# EAGLE board E-Book_v36 (EAGLE 9.7.0), part 1 of 3
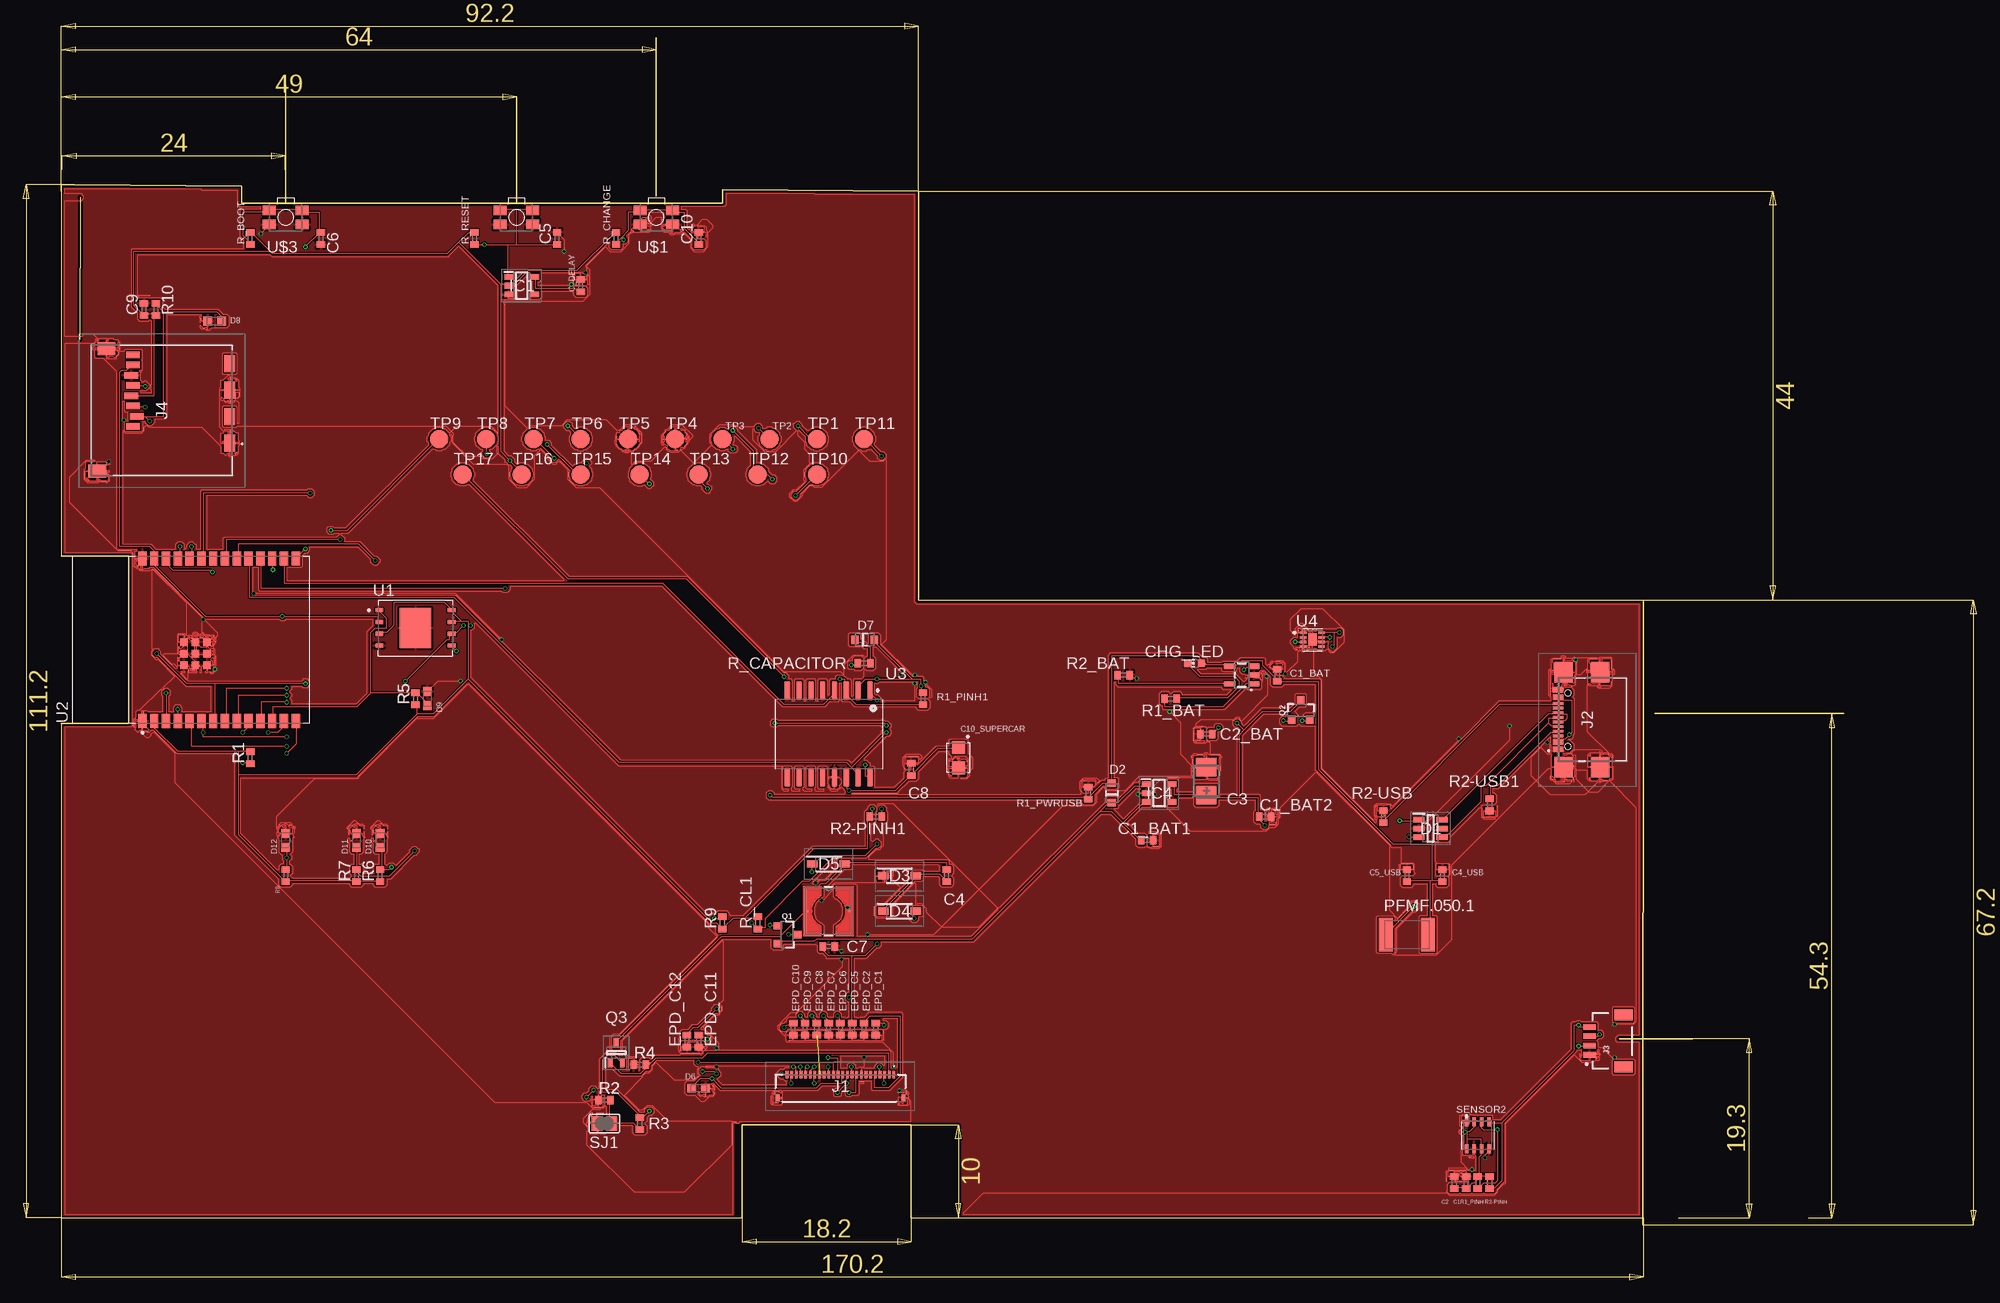
[diagram p0: board, top side]
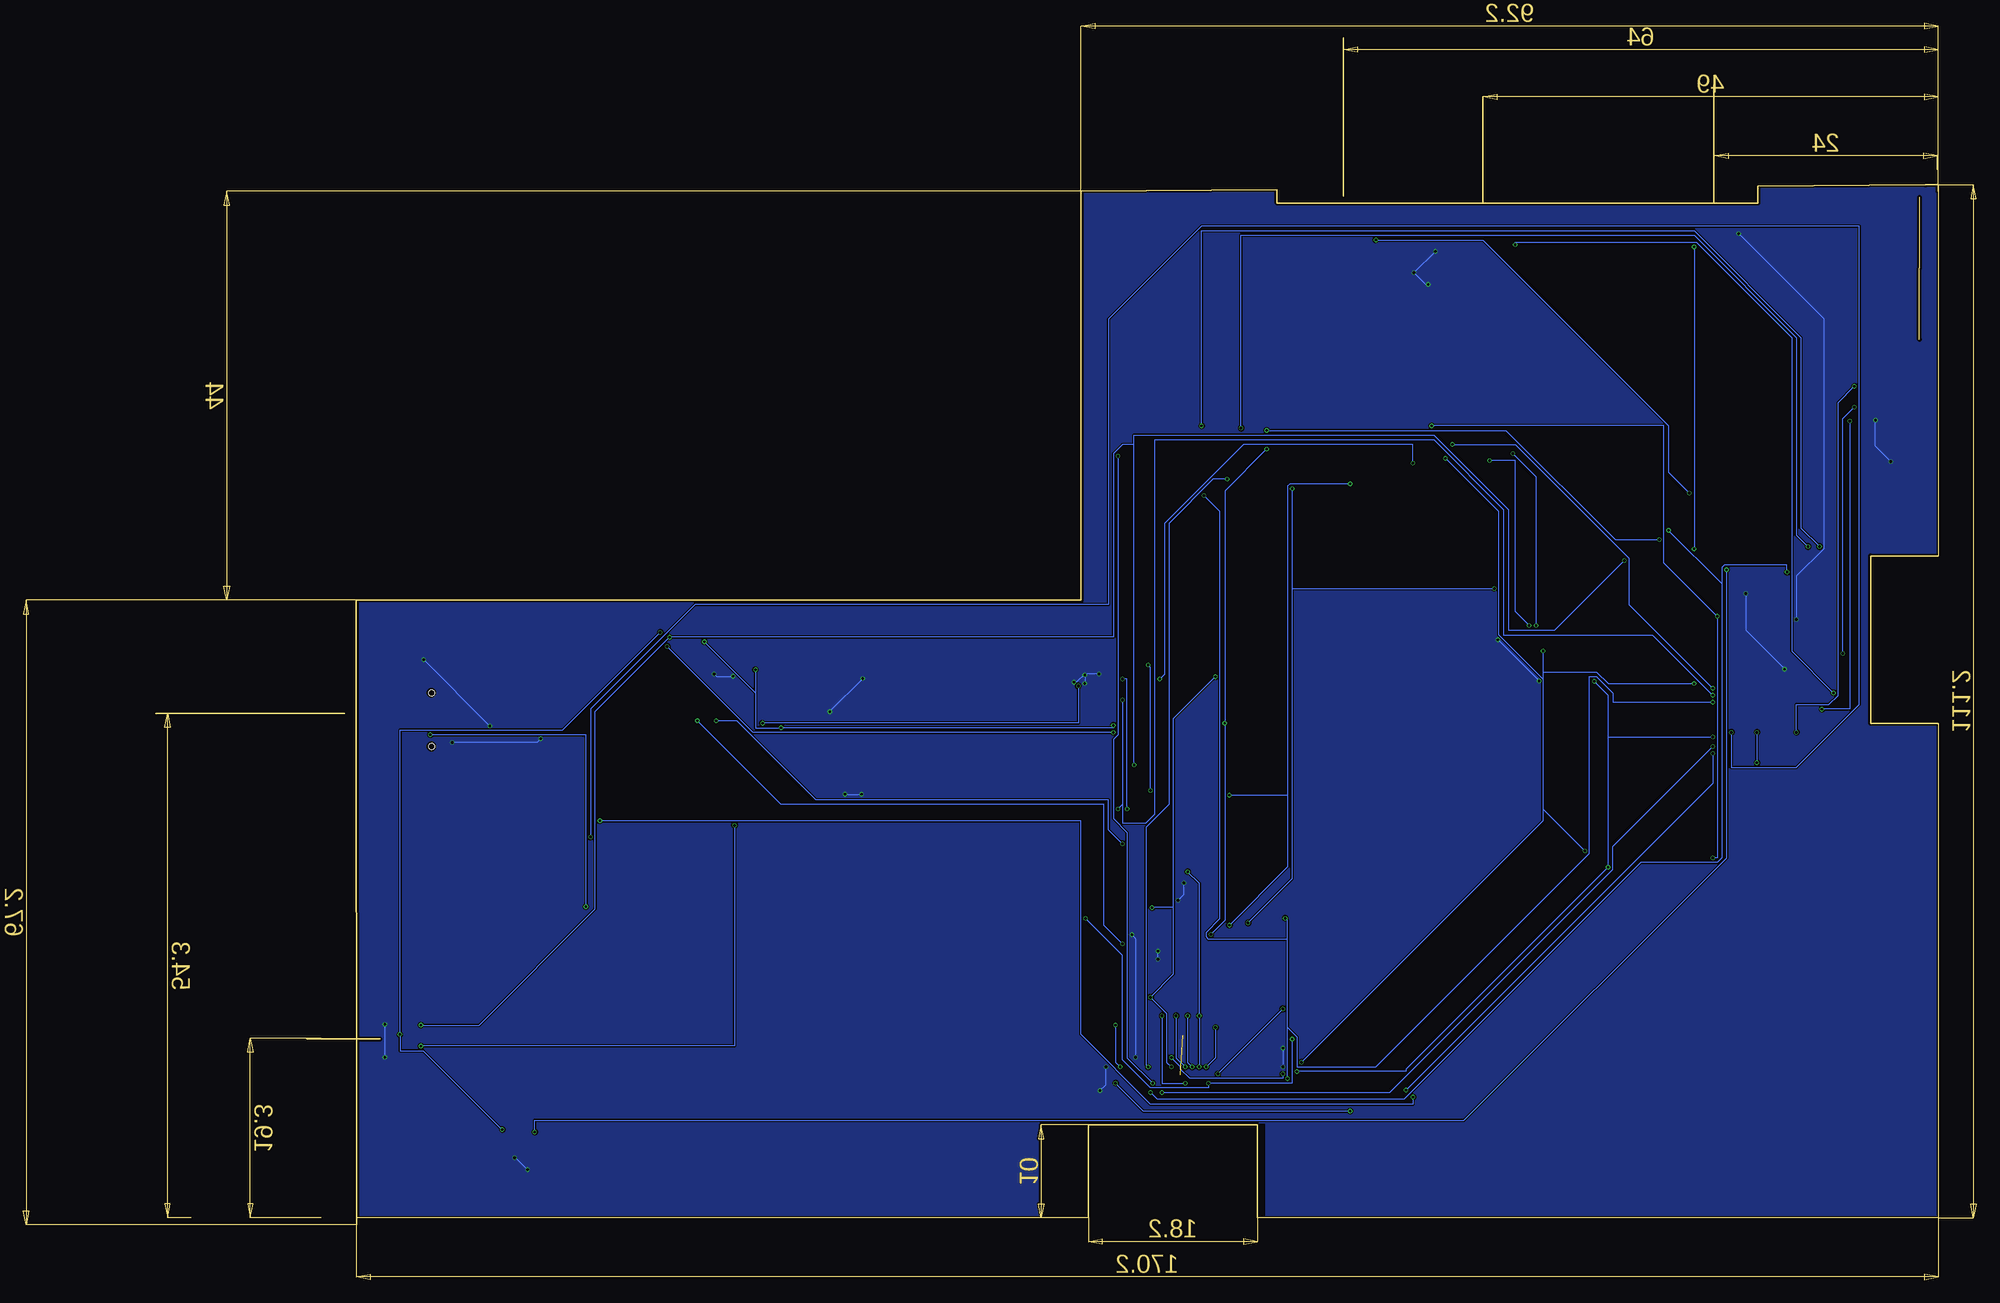
[diagram p1: board, bottom side, seen from below]

Size 210.15 x 135.22 mm. Coordinates in mm from the lower left corner, seen from the top.
Outline: 174.31,6.65 95.55,6.65 95.55,16.65 77.35,16.65 77.35,6.65 4.11,6.65 4.11,59.87 11.37,59.87 11.37,77.89 4.11,77.89 4.11,117.85 5.46,117.84 23.5,117.7 23.5,115.87 75.23,115.87 75.23,117.3 96.31,117.14 96.31,73.14 174.31,73.1 174.29,5.94
Outline: 195.88,60.95 175.56,60.95
Outline: 179.67,25.92 171.75,25.92
Outline: 28.24,128.57 28.24,115.87
Outline: 53.08,127.32 53.08,115.87
Outline: 68.11,133.64 68.11,116.59
Copper layers (1*16): Top 0.035mm / dielectric 1.6mm / Bottom 0.035mm
Design rules "jlcpcb-2layers": minimum track width 5mil, minimum drill 0.3mm, track to track 5mil, track to pad 5mil, pad to pad 5mil, via to via 5mil, smd to smd 5mil, copper to edge 0.2mm, drill to drill 6mil, minimum pad ring 10mil, minimum via ring 3mil, stop-mask expansion 4mil, vias tented up to drill 0mil, thermal gap 10mil

## Footprints (pad centres in the part's own frame; a part is rotated, then mirrored left to right if it is on the bottom)
ESP32_WROVER_EAGLE-LTSPICE_C0402 = smd 0.7 x 0.9: 1 -0.65,0; 2 0.65,0
EAGLE-LTSPICE_C0402 = smd 0.7 x 0.9: 1 -0.65,0; 2 0.65,0
RCL_CT3528 = smd 2 x 2.2: + -1.5,0; - 1.5,0
CAPCP3225X100N = smd 1.4 x 1.4: 1 -1.1,0; 2 1.1,0
ADAFRUIT_CHIP-LED0603 = smd 0.8 x 0.8: A 0,-0.75; C 0,0.75
SOT95P280X145-6N = smd 1.2 x 0.6: 1 -1.25,0.95; 2 -1.25,0; 3 -1.25,-0.95; 4 1.25,-0.95; 5 1.25,0; 6 1.25,0.95
ESP32_WROVER_AVX---SD0805S020S1R0_AVX_SD0805S020S1R0_0 = smd 0.8 x 0.9: 1 -1.05,0; 2 1.05,0
SOD3716X135N = smd 1.15 x 0.8: 1 -1.75,0; 2 1.75,0
DIOC1608X36N = smd 0.97 x 0.94: 1 -0.75,0; 2 0.75,0
SOT95P280X125-5N = smd 0.9 x 0.6: 1 -1.4,0.95; 2 -1.4,0; 3 -1.4,-0.95; 4 1.4,-0.95; 5 1.4,0.95
SOT95P280X120-5N = smd 0.9 x 0.6: 1 -1.4,0.95; 2 -1.4,0; 3 -1.4,-0.95; 4 1.4,-0.95; 5 1.4,0.95
FH34SRJ24S05SH99 = smd 0.3 x 0.8: 1 5.75,1.45; 2 5.25,1.45; 3 4.75,1.45; 4 4.25,1.45; 5 3.75,1.45; 6 3.25,1.45; 7 2.75,1.45; 8 2.25,1.45; 9 1.75,1.45; 10 1.25,1.45; 11 0.75,1.45; 12 0.25,1.45; 13 -0.25,1.45; 14 -0.75,1.45; 15 -1.25,1.45; 16 -1.75,1.45; 17 -2.25,1.45; 18 -2.75,1.45; 19 -3.25,1.45; 20 -3.75,1.45; 21 -4.25,1.45; 22 -4.75,1.45; 23 -5.25,1.45; 24 -5.75,1.45 | smd 0.4 x 0.8: MP1 6.75,-1.05; MP2 -6.75,-1.05
SAMACSYS_PARTS_USB4110GFA = smd 0.3 x 1.15: A1 -3.35,3.678; A4 -2.55,3.678; A5 -1.25,3.678; A6 -0.25,3.678; A7 0.25,3.678; A8 1.25,3.678; A9 2.55,3.678; A12 3.35,3.678; B1 3.05,3.678; B4 2.25,3.678; B5 1.75,3.678; B6 0.75,3.678; B7 -0.75,3.678; B8 -1.75,3.678; B9 -2.25,3.678; B12 -3.05,3.678 | smd 2.18 x 2: MP1 -5.11,-0.827; MP2 5.11,-0.827; MP3 -5.11,3.103; MP4 5.11,3.103 | hole 0.65: -2.89,2.603; 2.89,2.603
JST04_1MM_RA = smd 0.6 x 1.35: 1 -1.5,0; 2 -0.5,0; 3 0.5,0; 4 1.5,0 | smd 1.2 x 2: NC1 2.8,-3.675; NC2 -2.8,-3.675
112ATAARR03ATTEND = smd 1.8 x 1.2: G1 10.6,10.4; G2 4.9,10.4; S1 7.75,10.4; S2 2.05,10.4 | smd 1.4 x 1.9: G3 13.6,-3.85; G4 0.45,-2.85 | smd 0.7 x 1.5: P1 8.8,0; P2 7.7,0.4; P3 6.6,0; P4 5.5,-0.2; P5 4.4,0; P6 3.3,-0.2; P7 2.2,0; P8 1.1,0
IND_4828-WE-TPC_WRE = smd 0.127 x 0.127: 1 -2.286,0; 2 2.286,0
ESP32_WROVER_SPARKFUN-IC-POWER_SOT23-5 = smd 0.55 x 1.2: 1 -0.95,-1.3; 2 0,-1.3; 3 0.95,-1.3; 4 0.95,1.3; 5 -0.95,1.3
ESP32C6_VARISTOR_CT/CN1812 = smd 1.5 x 3.6: 1 -2.25,0; 2 2.25,0
ESP32_WROVER_SPARKFUN-DISCRETESEMI_SOT23-3 = smd 0.8 x 0.9: 1 -0.95,-1; 2 0.95,-1; 3 0,1.1
SOT65P210X110-3N = smd 1.05 x 0.5: 1 -1.05,0.65; 2 -1.05,-0.65; 3 1.05,0
ESP32_WROVER_EAGLE-LTSPICE_R0402 = smd 0.7 x 0.9: 1 -0.65,0; 2 0.65,0
MYBUTTON = smd 1.4 x 1.05: 1 1.75,0.75; 2 -1.75,0.75; 3 -1.75,-0.75; 4 1.75,-0.75
ESP32_WROVER_BME680_PSON80P300X300X100-8N = smd 1.016 x 0.5: 1 1.458,1.2; 2 1.458,0.4; 3 1.458,-0.4; 4 1.458,-1.2; 5 -1.458,-1.22; 6 -1.458,-0.4; 7 -1.458,0.4; 8 -1.458,1.2
SJ = smd 1.168 x 1.6: 1 -0.762,0; 2 0.762,0
TP20R = smd 2 x 2: TP 0,0
SON127P600X800X80-9N = smd 0.94 x 0.44: 1 -3.895,1.905; 2 -3.895,0.635; 3 -3.895,-0.635; 4 -3.895,-1.905; 5 3.895,-1.905; 6 3.895,-0.635; 7 3.895,0.635; 8 3.895,1.905 | smd 3.4 x 4.3: 9 0,0
XCVR_ESP32-C6-WROOM-1-N8 = smd 1.5 x 0.9: 1 -8.75,5.26; 2 -8.75,3.99; 3 -8.75,2.72; 4 -8.75,1.45; 5 -8.75,0.18; 6 -8.75,-1.09; 7 -8.75,-2.36; 8 -8.75,-3.63; 9 -8.75,-4.9; 10 -8.75,-6.17; 11 -8.75,-7.44; 12 -8.75,-8.71; 13 -8.75,-9.98; 14 -8.75,-11.25; 15 8.75,-11.25; 16 8.75,-9.98; 17 8.75,-8.71; 18 8.75,-7.44; 19 8.75,-6.17; 20 8.75,-4.9; 21 8.75,-3.63; 22 8.75,-2.36; 23 8.75,-1.09; 24 8.75,0.18; 25 8.75,1.45; 26 8.75,2.72; 27 8.75,3.99; 28 8.75,5.26 | smd 0.8 x 0.8: 29_1 -2.755,0.79; 29_2 -1.505,0.79; 29_3 -0.255,0.79; 29_4 -2.755,-0.46; 29_5 -1.505,-0.46; 29_6 -0.255,-0.46; 29_7 -2.755,-1.71; 29_8 -1.505,-1.71; 29_9 -0.255,-1.71
SOIC127P1032X265-16N = smd 2.05 x 0.59: 1 -4.655,4.445; 2 -4.655,3.175; 3 -4.655,1.905; 4 -4.655,0.635; 5 -4.655,-0.635; 6 -4.655,-1.905; 7 -4.655,-3.175; 8 -4.655,-4.445; 9 4.655,-4.445; 10 4.655,-3.175; 11 4.655,-1.905; 12 4.655,-0.635; 13 4.655,0.635; 14 4.655,1.905; 15 4.655,3.175; 16 4.655,4.445
SON50P200X200X80-9N = smd 0.76 x 0.27: 1 -0.985,0.75; 2 -0.985,0.25; 3 -0.985,-0.25; 4 -0.985,-0.75; 5 0.985,-0.75; 6 0.985,-0.25; 7 0.985,0.25; 8 0.985,0.75 | smd 0.9 x 1.3: 9 0,0

## Placement (x,y rotation side)
C1  100nF  [ESP32_WROVER_EAGLE-LTSPICE_C0402]  155.24,10.46 90 top
C1_BAT  4.7uF  [ESP32_WROVER_EAGLE-LTSPICE_C0402]  134.92,65.07 90 top
C1_BAT1  4.7uF  [EAGLE-LTSPICE_C0402]  120.95,47.29 0 top
C1_BAT2  4.7uF  [EAGLE-LTSPICE_C0402]  133.65,49.83 0 top
C2  100nF  [ESP32_WROVER_EAGLE-LTSPICE_C0402]  153.97,10.46 90 top
C2_BAT  4.7uF  [ESP32_WROVER_EAGLE-LTSPICE_C0402]  127.3,58.72 180 top
C3  100uF TANT  [RCL_CT3528]  127.3,53.64 90 top
C4  4.7uF/25V  [ESP32_WROVER_EAGLE-LTSPICE_C0402]  99.36,43.48 90 top
C4_USB  1000nF  [EAGLE-LTSPICE_C0402]  152.7,43.48 90 top
C5  1uF  [ESP32_WROVER_EAGLE-LTSPICE_C0402]  57.45,112.06 90 top
C5_USB  4.7uF  [EAGLE-LTSPICE_C0402]  148.89,43.48 90 top
C6  100nF  [ESP32_WROVER_EAGLE-LTSPICE_C0402]  32.05,112.06 270 top
C7  10uF  [ESP32_WROVER_EAGLE-LTSPICE_C0402]  86.66,35.86 0 top
C8  100nF  [ESP32_WROVER_EAGLE-LTSPICE_C0402]  95.55,54.91 90 top
C9  100nF  [ESP32_WROVER_EAGLE-LTSPICE_C0402]  13,104.44 90 top
C10  100nF  [ESP32_WROVER_EAGLE-LTSPICE_C0402]  72.69,112.06 90 top
C10_SUPERCAR  CPH3225A  [CAPCP3225X100N]  100.63,56.18 270 top
C_DELAY  100nF  [ESP32_WROVER_EAGLE-LTSPICE_C0402]  59.99,106.98 90 top
CHG_LED  [ADAFRUIT_CHIP-LED0603]  126.03,66.34 90 top
D1  USBLC6-2SC6Y  [SOT95P280X145-6N]  151.43,48.56 0 top
D2  ESP32_WROVER_AVX---SD0805S020S1R0_AVX_SD0805S020S1R0_0_0AVX_SD0805S020S1R0_0_0  [ESP32_WROVER_AVX---SD0805S020S1R0_AVX_SD0805S020S1R0_0]  117.14,52.37 90 top
D3  MBR0530  [SOD3716X135N]  94.28,43.48 0 top
D4  MBR0530  [SOD3716X135N]  94.28,39.67 0 top
D5  MBR0530  [SOD3716X135N]  86.66,44.75 0 top
D6  PGB1010603MR  [DIOC1608X36N]  72.69,20.62 0 top
D7  ESP32_WROVER_AVX---SD0805S020S1R0_AVX_SD0805S020S1R0_0_0AVX_SD0805S020S1R0_0_0  [ESP32_WROVER_AVX---SD0805S020S1R0_AVX_SD0805S020S1R0_0]  90.53,68.88 0 top
D8  PGB1010603MR  [DIOC1608X36N]  20.62,103.17 180 top
D9  PGB1010603MR  [DIOC1608X36N]  43.48,62.53 90 top
D10  PGB1010603MR  [DIOC1608X36N]  38.4,47.29 90 top
D11  PGB1010603MR  [DIOC1608X36N]  35.86,47.29 90 top
D12  PGB1010603MR  [DIOC1608X36N]  28.24,47.29 90 top
EPD_C1  1uF/50V  [ESP32_WROVER_EAGLE-LTSPICE_C0402]  91.74,26.97 90 top
EPD_C2  1uF/50V  [ESP32_WROVER_EAGLE-LTSPICE_C0402]  90.47,26.97 90 top
EPD_C5  0.1uF/50V  [ESP32_WROVER_EAGLE-LTSPICE_C0402]  89.2,26.97 90 top
EPD_C6  1uF/50V  [ESP32_WROVER_EAGLE-LTSPICE_C0402]  87.93,26.97 90 top
EPD_C7  1uF/50V  [ESP32_WROVER_EAGLE-LTSPICE_C0402]  86.66,26.97 90 top
EPD_C8  1uF/50V  [ESP32_WROVER_EAGLE-LTSPICE_C0402]  85.39,26.97 90 top
EPD_C9  1uF/50V  [ESP32_WROVER_EAGLE-LTSPICE_C0402]  84.12,26.97 90 top
EPD_C10  1uF/50V  [ESP32_WROVER_EAGLE-LTSPICE_C0402]  82.85,26.97 90 top
EPD_C11  1uF/50V  [ESP32_WROVER_EAGLE-LTSPICE_C0402]  72.69,25.7 90 top
EPD_C12  1uF/50V  [ESP32_WROVER_EAGLE-LTSPICE_C0402]  71.42,25.7 90 top
IC1  BD5229G-TR  [SOT95P280X125-5N]  53.64,106.98 0 top
IC4  XC6220A331MR-G  [SOT95P280X120-5N]  122.22,52.37 0 top
J1  FH34SRJ-24S-0.5SH_99_  [FH34SRJ24S05SH99]  87.93,20.62 0 top
J2  SAMACSYS_PARTS_USB4110-GF-A  [SAMACSYS_PARTS_USB4110GFA]  168.83,60.27 90 top
J3  QWIIC_RIGHT_ANGLE  [JST04_1MM_RA]  168.53,25.7 90 top
J4  112A-TAAR-R03_ATTEND  [112ATAARR03ATTEND]  11.81,100.63 270 top
L1  744043680IND_4828-WE-TPC_WRE  [IND_4828-WE-TPC_WRE]  86.66,39.67 0 top
MCP73831  ESP32_WROVER_SPARKFUN-IC-POWER_MCP73831  [ESP32_WROVER_SPARKFUN-IC-POWER_SOT23-5]  131.11,65.07 90 top
PFMF.050.1  ESP32C6_VARISTORCN1812  [ESP32C6_VARISTOR_CT/CN1812]  148.89,37.13 0 top
Q1  20V/4.2A/52mΩ/1.4W  [ESP32_WROVER_SPARKFUN-DISCRETESEMI_SOT23-3]  82.19,37.13 270 top
Q2  20V/4.2A/52mΩ/1.4W  [ESP32_WROVER_SPARKFUN-DISCRETESEMI_SOT23-3]  137.46,61.26 0 top
Q3  SI1308EDL-T1-GE3  [SOT65P210X110-3N]  63.8,24.43 90 top
R1  10K  [ESP32_WROVER_EAGLE-LTSPICE_R0402]  24.43,56.18 90 top
R1_BAT  200  [ESP32_WROVER_EAGLE-LTSPICE_R0402]  123.49,62.53 0 top
R1_PINH  10K  [ESP32_WROVER_EAGLE-LTSPICE_R0402]  156.51,10.46 90 top
R1_PINH1  10K  [ESP32_WROVER_EAGLE-LTSPICE_R0402]  96.82,62.53 90 top
R1_PWRUSB  100K  [ESP32_WROVER_EAGLE-LTSPICE_R0402]  114.6,52.37 90 top
R2  2.2  [ESP32_WROVER_EAGLE-LTSPICE_R0402]  62.53,19.35 0 top
R2-PINH  10K  [ESP32_WROVER_EAGLE-LTSPICE_R0402]  157.78,10.46 90 top
R2-PINH1  10k  [ESP32_WROVER_EAGLE-LTSPICE_R0402]  91.74,49.83 180 top
R2-USB  5K1  [ESP32_WROVER_EAGLE-LTSPICE_R0402]  146.35,49.83 90 top
R2-USB1  5k1  [ESP32_WROVER_EAGLE-LTSPICE_R0402]  157.78,51.1 90 top
R2_BAT  2K  [ESP32_WROVER_EAGLE-LTSPICE_R0402]  118.41,65.07 180 top
R3  0.47  [ESP32_WROVER_EAGLE-LTSPICE_R0402]  66.34,16.81 90 top
R4  10K  [ESP32_WROVER_EAGLE-LTSPICE_R0402]  66.34,23.16 0 top
R5  10K  [ESP32_WROVER_EAGLE-LTSPICE_R0402]  42.21,62.53 90 top
R6  10K  [ESP32_WROVER_EAGLE-LTSPICE_R0402]  38.4,43.48 90 top
R7  10K  [ESP32_WROVER_EAGLE-LTSPICE_R0402]  35.86,43.48 90 top
R8  10K  [ESP32_WROVER_EAGLE-LTSPICE_R0402]  28.24,43.48 90 top
R9  10K  [ESP32_WROVER_EAGLE-LTSPICE_R0402]  75.23,38.4 90 top
R10  10K  [ESP32_WROVER_EAGLE-LTSPICE_R0402]  14.27,104.44 90 top
R_BOOT  10K  [ESP32_WROVER_EAGLE-LTSPICE_R0402]  24.43,112.06 90 top
R_CAPACITOR  15  [ESP32_WROVER_EAGLE-LTSPICE_R0402]  90.47,66.34 180 top
R_CHANGE  10K  [ESP32_WROVER_EAGLE-LTSPICE_R0402]  63.8,112.06 90 top
R_CL1  10K  [ESP32_WROVER_EAGLE-LTSPICE_R0402]  79.04,38.4 90 top
R_RESET  10K  [ESP32_WROVER_EAGLE-LTSPICE_R0402]  48.56,112.06 90 top
RESET_BUTTON  BUTTON_CUSYOMV1  [MYBUTTON]  53.08,114.32 180 top
SENSOR2  ESP32_WROVER_BME680_BME680  [ESP32_WROVER_BME680_PSON80P300X300X100-8N]  156.51,15.54 90 top
SJ1  [SJ]  62.53,16.81 0 top
TP1  TPTP20R  [TP20R]  85.39,90.47 0 top
TP2  TPTP20R  [TP20R]  80.31,90.47 0 top
TP3  TPTP20R  [TP20R]  75.23,90.47 0 top
TP4  TPTP20R  [TP20R]  70.15,90.47 0 top
TP5  TPTP20R  [TP20R]  65.07,90.47 0 top
TP6  TPTP20R  [TP20R]  59.99,90.47 0 top
TP7  TPTP20R  [TP20R]  54.91,90.47 0 top
TP8  TPTP20R  [TP20R]  49.83,90.47 0 top
TP9  TPTP20R  [TP20R]  44.75,90.47 0 top
TP10  TPTP20R  [TP20R]  85.39,86.66 0 top
TP11  TPTP20R  [TP20R]  90.47,90.47 0 top
TP12  TPTP20R  [TP20R]  79.04,86.66 0 top
TP13  TPTP20R  [TP20R]  72.69,86.66 0 top
TP14  TPTP20R  [TP20R]  66.34,86.66 0 top
TP15  TPTP20R  [TP20R]  59.99,86.66 0 top
TP16  TPTP20R  [TP20R]  53.64,86.66 0 top
TP17  TPTP20R  [TP20R]  47.29,86.66 0 top
U1  W25Q512JVEIQ  [SON127P600X800X80-9N]  42.21,70.15 0 top
U2  ESP32-C6-WROOM-1-N8  [XCVR_ESP32-C6-WROOM-1-N8]  18.08,68.88 90 top
U3  DS3231SN#  [SOIC127P1032X265-16N]  86.66,58.72 270 top
U4  MAX17048G+T10  [SON50P200X200X80-9N]  138.73,68.88 0 top
U$1  BUTTON_CUSYOMV1  [MYBUTTON]  68.11,114.32 180 top
U$3  BUTTON_CUSYOMV1  [MYBUTTON]  28.24,114.32 180 top

## Library data of the parts
C1 C1_BAT C1_BAT1 C1_BAT2 C2 C2_BAT C4 C4_USB C5 C5_USB C6-C10 C_DELAY EPD_C1 EPD_C2 EPD_C5-EPD_C12 = DeskAssistant v19 v1; SPICEMODEL: NONE; SPICEPREFIX: C
C3 = DeskAssistant v19 v1; SPICEPREFIX: C
C10_SUPERCAR = DeskAssistant v19 v1; AVAILABILITY: Not in stock; CHECK_PRICES: https://www.snapeda.com/parts/CPH3225A/Seiko+Instruments/view-part/?ref=eda; DESCRIPTION: 11 mF (EDLC) Supercapacitor 3.3 V 1210 (3225 Metric) - -; MF: Seiko Instruments; MP: CPH3225A; PACKAGE: 1210 Seiko; PRICE: None; PURCHASE-URL: https://www.snapeda.com/api/url_track_click_mouser/?unipart_id=562593&manufacturer=Seiko Instruments&part_name=CPH3225A&search_term=None; SNAPEDA_LINK: https://www.snapeda.com/parts/CPH3225A/Seiko+Instruments/view-part/?ref=snap
CHG_LED PFMF.050.1 RESET_BUTTON SJ1 TP1-TP17 U$1 U$3 = DeskAssistant v19 v1
D1 = DeskAssistant v19 v1; AVAILABILITY: In Stock; CHECK_PRICES: https://www.snapeda.com/parts/USBLC6-2SC6Y/STMicroelectronics/view-part/?ref=eda; DESCRIPTION: 17V Clamp 5A (8/20µs) Ipp Tvs Diode Surface Mount SOT-23-6; MF: STMicroelectronics; MP: USBLC6-2SC6Y; PACKAGE: SOT-23-6 STMicroelectronics; PRICE: None; SNAPEDA_LINK: https://www.snapeda.com/parts/USBLC6-2SC6Y/STMicroelectronics/view-part/?ref=snap
D2 D7 = DeskAssistant v19 v1; CENTROID_NOT_SPECIFIED: No; DATASHEET: http://datasheets.avx.com/schottky.pdf; DIGIKEY_DESCRIPTION: DIODE SCHOTTKY 20V 1A 0805; DIGIKEY_PART_NUMBER: 478-7800-1-ND; LEAD_FREE: yes; MF: AVX; MOUSER_PART_NUMBER: 581-SD0805S020S1R0; PACKAGE: 0805 (2012 metric); PREFIX: D; ROHS: yes; TEMPERATURE_RANGE_HIGH: +125°C; TEMPERATURE_RANGE_LOW: -55°C
D3-D5 = DeskAssistant v19 v1; AVAILABILITY: In Stock; CHECK_PRICES: https://www.snapeda.com/parts/MBR0530/Onsemi/view-part/?ref=eda; DESCRIPTION: Diode Schottky 30 V 500mA Surface Mount SOD-123; MF: ON Semiconductor; MP: MBR0530; PACKAGE: SOD-123-2 ON Semiconductor; PRICE: None; PURCHASE-URL: https://www.snapeda.com/api/url_track_click_mouser/?unipart_id=179458&manufacturer=ON Semiconductor&part_name=MBR0530&search_term=None; SNAPEDA_LINK: https://www.snapeda.com/parts/MBR0530/Onsemi/view-part/?ref=snap
D6 D8-D12 = DeskAssistant v19 v1; AVAILABILITY: In Stock; CHECK_PRICES: https://www.snapeda.com/parts/PGB1010603MR/Littelfuse/view-part/?ref=eda; DESCRIPTION: 150V (Typ) Clamp - Ipp Tvs Diode Surface Mount 0603 (1608 Metric); MF: Littelfuse Inc.; MP: PGB1010603MR; PACKAGE: 0603 Littelfuse Inc.; PRICE: None; PURCHASE-URL: https://www.snapeda.com/api/url_track_click_mouser/?unipart_id=5659453&manufacturer=Littelfuse Inc.&part_name=PGB1010603MR&search_term=None; SNAPEDA_LINK: https://www.snapeda.com/parts/PGB1010603MR/Littelfuse/view-part/?ref=snap
IC1 = DeskAssistant v19 v1; DESCRIPTION: Voltage Detector with Adjustable Delay Time: CMOS processes are utilized to develop high precision, low current consumption CMOS reset ICs that allow arbitrary setting of the delay time. The extensive lineup includes both Nch Open Drain and CMOS output types in a wide range of detection voltages (from 2.3V to 6.0V, in 0.1V steps), enabling selection of the ideal solution based on customer requirements. In addition, the entire series is of course both lead-free and RoHS-compliant.; HEIGHT: 1.25mm; MANUFACTURER_NAME: ROHM Semiconductor; MANUFACTURER_PART_NUMBER: BD5229G-TR; MOUSER_PART_NUMBER: 755-BD5229G-TR; MOUSER_PRICE-STOCK: https://www.mouser.co.uk/ProductDetail/ROHM-Semiconductor/BD5229G-TR?qs=4kLU8WoGk0vvnhrrYwdszw%3D%3D
IC4 = DeskAssistant v19 v1; DESCRIPTION: LDO Voltage Regulators; HEIGHT: 1.2mm; MANUFACTURER_NAME: Torex; MANUFACTURER_PART_NUMBER: XC6220A331MR-G; MOUSER_PART_NUMBER: 865-XC6220A331MR-G; MOUSER_PRICE-STOCK: https://www.mouser.co.uk/ProductDetail/Torex-Semiconductor/XC6220A331MR-G?qs=AsjdqWjXhJ8ZSWznL1J0gg%3D%3D
J1 = DeskAssistant v19 v1; DESCRIPTION: 24 Position FFC, FPC Connector Contacts, Top and Bottom 0.020" (0.50mm) Surface Mount, Right Angle; HEIGHT: 1.1mm; MANUFACTURER_NAME: Hirose; MANUFACTURER_PART_NUMBER: FH34SRJ-24S-0.5SH(99); MOUSER_PART_NUMBER: 798-FH34SRJ24S05SH99; MOUSER_PRICE-STOCK: https://www.mouser.co.uk/ProductDetail/Hirose-Connector/FH34SRJ-24S-0.5SH99?qs=vcbW%252B4%252BSTIpKBl5ap9J8Fw%3D%3D
J2 = DeskAssistant v19 v1; DESCRIPTION: CONN USB 2.0 TYPE-C R/A SMT; HEIGHT: 3.26mm; MANUFACTURER_NAME: GCT (GLOBAL CONNECTOR TECHNOLOGY); MANUFACTURER_PART_NUMBER: USB4110-GF-A; MOUSER_PART_NUMBER: 640-USB4110-GF-A; MOUSER_PRICE-STOCK: https://www.mouser.co.uk/ProductDetail/GCT/USB4110-GF-A?qs=KUoIvG%2F9IlYiZvIXQjyJeA%3D%3D
J3 = DeskAssistant v19 v1; PROD_ID: CONN-13694
J4 = DeskAssistant v19 v1; DESCRIPTION: Micro SD Card Socket, Push-Push Type, Top Mount, SMT, H=1.83mm, 10u; HEIGHT: 1.9mm; MANUFACTURER_NAME: ATTEND; MANUFACTURER_PART_NUMBER: 112A-TAAR-R03 ATTEND
L1 = DeskAssistant v19 v1; COPYRIGHT: Copyright (C) 2024 Ultra Librarian. All rights reserved.; MANUFACTURER_PART_NUMBER: 744043680; MFR_NAME: Wurth Electronics
MCP73831 = DeskAssistant v19 v1; PROD_ID: IC-09995
Q1 Q2 = DeskAssistant v19 v1; PROD_ID: TRAN-14388
Q3 = DeskAssistant v19 v1; AVAILABILITY: In Stock; CHECK_PRICES: https://www.snapeda.com/parts/SI1308EDL-T1-GE3/Vishay+Siliconix/view-part/?ref=eda; DESCRIPTION: Si1308EDL-T1-GE3 N-channel MOSFET Transistor, 1.5 A, 30 V, 3-Pin SC-70 | Siliconix / Vishay SI1308EDL-T1-GE3; MF: Vishay Siliconix; MP: SI1308EDL-T1-GE3; PACKAGE: SOT-323 Vishay Semiconductor; PRICE: None; PURCHASE-URL: https://www.snapeda.com/api/url_track_click_mouser/?unipart_id=274603&manufacturer=Vishay Siliconix&part_name=SI1308EDL-T1-GE3&search_term=None; SNAPEDA_LINK: https://www.snapeda.com/parts/SI1308EDL-T1-GE3/Vishay+Siliconix/view-part/?ref=snap
R1 R1_BAT R1_PINH R1_PINH1 R1_PWRUSB R2 R2-PINH R2-PINH1 R2-USB R2-USB1 R2_BAT R3-R10 R_BOOT R_CAPACITOR R_CHANGE R_CL1 R_RESET = DeskAssistant v19 v1; SPICEMODEL: NONE; SPICEPREFIX: R
SENSOR2 = DeskAssistant v19 v1; AVAILABILITY: Unavailable; DESCRIPTION: Integrated Environmental Unit; MF: Bosch Sensortec; MP: BME680; PACKAGE: LGA-8 Bosch Tools; PRICE: None
U1 = DeskAssistant v19 v1; AVAILABILITY: In Stock; CHECK_PRICES: https://www.snapeda.com/parts/W25Q512JVEIQ/Winbond+Electronics/view-part/?ref=eda; DESCRIPTION: FLASH - NOR Memory IC 512Mb (64M x 8) SPI - Quad I/O 133 MHz 8-WSON (8x6); MF: Winbond Electronics; MP: W25Q512JVEIQ; PACKAGE: Package; PRICE: None; SNAPEDA_LINK: https://www.snapeda.com/parts/W25Q512JVEIQ/Winbond+Electronics/view-part/?ref=snap
U2 = DeskAssistant v19 v1; AVAILABILITY: In Stock; CHECK_PRICES: https://www.snapeda.com/parts/ESP32-C6-WROOM-1-N8/Espressif+Systems/view-part/?ref=eda; DESCRIPTION: Multiprotocol Modules ESP32-C6 module, Wi-Fi 6 in 2.4 GHz band, Bluetooth 5, Zigbee 3.0 and Thread. ESP34-WROOM Compatible - ENGINEERING SAMPLE; MF: Espressif Systems; MP: ESP32-C6-WROOM-1-N8; PACKAGE: None; PRICE: None; SNAPEDA_LINK: https://www.snapeda.com/parts/ESP32-C6-WROOM-1-N8/Espressif+Systems/view-part/?ref=snap
U3 = DeskAssistant v19 v1; AVAILABILITY: In Stock; CHECK_PRICES: https://www.snapeda.com/parts/DS3231SN%23/Analog+Devices/view-part/?ref=eda; DESCRIPTION: Extremely Accurate I²C-Integrated RTC/TCXO/Crystal; MF: Analog Devices; MP: DS3231SN#; PACKAGE: SOIC-16 Maxim; PRICE: None; PURCHASE-URL: https://www.snapeda.com/api/url_track_click_mouser/?unipart_id=99048&manufacturer=Analog Devices&part_name=DS3231SN#&search_term=None; SNAPEDA_LINK: https://www.snapeda.com/parts/DS3231SN%23/Analog+Devices/view-part/?ref=snap
U4 = DeskAssistant v19 v1; AVAILABILITY: In Stock; CHECK_PRICES: https://www.snapeda.com/parts/MAX17048G+T10/Analog+Devices/view-part/?ref=eda; DESCRIPTION: 3µA 1-Cell/2-Cell Fuel Gauge with ModelGauge; MF: Analog Devices; MP: MAX17048G+T10; PACKAGE: TDFN-8 Maxim; PRICE: None; PURCHASE-URL: https://www.snapeda.com/api/url_track_click_mouser/?unipart_id=329239&manufacturer=Analog Devices&part_name=MAX17048G+T10&search_term=None; SNAPEDA_LINK: https://www.snapeda.com/parts/MAX17048G+T10/Analog+Devices/view-part/?ref=snap

## Nets
3V3: C1_BAT2.1 C3.+ C9.1 D7.2 IC1.2 IC4.5 J3.2 J4.P4 Q2.3 R1.2 R1_PINH1.2 R2-PINH1.2 R5.1 R6.1 R7.1 R8.1 R9.1 R10.1 R_BOOT.2 R_CHANGE.2 R_CL1.2 R_RESET.2 TP16.TP U1.3 U1.7 U1.8 U2.2 U3.2
32KHZ: R2-PINH1.1 U2.9 U3.1
DN: D1.4 J2.A7 J2.B7
DP: D1.6 J2.A6 J2.B6
EPD_3V3: C7.1 EPD_C5.2 J1.15 J1.16 L1.2 Q2.2 TP17.TP
EPD_3V3_C: Q2.1 R_CL1.1 TP13.TP U2.18
EPD_BUSY: J1.9 TP9.TP U2.26
EPD_CS: D6.1 J1.12 R9.2 TP10.TP U2.11
EPD_DC: J1.11 TP11.TP U2.5
EPD_RST: J1.10 TP12.TP U2.21
FLASH_CS: D9.1 R5.2 U1.1 U2.12
GDR: J1.2 Q3.1 R4.2
GND: C1.2 C1_BAT1.2 C1_BAT2.2 C1_BAT.2 C2.2 C2_BAT.2 C3.- C4_USB.2 C5.2 C5_USB.2 C6.2 C7.2 C8.2 C9.2 C10.2 C10_SUPERCAR.2 C_DELAY.2 D1.2 D3.1 D6.2 D8.2 D9.2 D10.2 D11.2 D12.2 EPD_C1.1 EPD_C2.1 EPD_C5.1 EPD_C6.1 EPD_C7.1 EPD_C8.1 EPD_C9.1 EPD_C10.1 EPD_C11.1 EPD_C12.1 IC1.3 IC4.2 J1.8 J1.17 J1.MP1 J1.MP2 J2.A1 J2.A12 J2.B1 J2.B12 J2.MP1 J2.MP2 J2.MP3 J2.MP4 J3.1 J4.G1 J4.G2 J4.G3 J4.G4 J4.P6 MCP73831.2 R1_PWRUSB.2 R2-USB1.1 R2-USB.2 R2.1 R2_BAT.1 R4.1 RESET_BUTTON.1 RESET_BUTTON.2 SENSOR2.1 SENSOR2.5 SENSOR2.7 SJ1.1 TP4.TP TP5.TP U1.4 U1.9 U2.1 U2.28 U2.29_1 U2.29_2 U2.29_3 U2.29_4 U2.29_5 U2.29_6 U2.29_7 U2.29_8 U2.29_9 U3.13 U4.1 U4.4 U4.6 U4.9 U$1.1 U$1.2 U$3.1 U$3.2
GPIO8: R1.1 U2.10
I2C_PW: C1.1 C2.1 R1_PINH.2 R2-PINH.2 SENSOR2.2 SENSOR2.6 SENSOR2.8 U2.17
INT_RTC: R1_PINH1.1 TP15.TP U2.8 U3.3
IO/BOOT: C6.1 R_BOOT.1 U2.15 U$3.3 U$3.4
IO/CHANGE: C10.1 R_CHANGE.1 U2.23 U$1.3 U$1.4
MISO: D12.1 J4.P7 R8.2 TP6.TP U1.2 U2.27
MOSI: D11.1 J1.14 J4.P3 R7.2 TP7.TP U1.5 U2.7
N$1: J2.B5 R2-USB.1
N$2: J2.A5 R2-USB1.2
N$4: CHG_LED.C R1_BAT.2
N$5: EPD_C1.2 J1.4
N$6: MCP73831.5 R2_BAT.2
N$7: EPD_C2.2 J1.5
N$9: MCP73831.1 R1_BAT.1
N$11: EPD_C6.2 J1.18
N$12: EPD_C7.2 J1.19
N$13: EPD_C8.2 J1.20
N$15: EPD_C10.2 J1.22
N$17: EPD_C12.2 J1.24
N$24: C_DELAY.1 IC1.5
N$26: C1_BAT1.1 D2.1 IC4.1 IC4.3 Q1.2
N$30: C4.1 D3.2 D4.1
N$31: D7.1 R_CAPACITOR.1
PREVGH: D5.1 EPD_C9.2 J1.21
PREVGL: D4.2 EPD_C11.2 J1.23
RESE: J1.3 Q3.2 R3.2
RESE': R2.2 R3.1 SJ1.2
RESET: C5.1 IC1.1 R_RESET.1 RESET_BUTTON.3 RESET_BUTTON.4 U2.3
RTC_RST: U2.16 U3.4
RX: TP2.TP U2.24
SCK: D10.1 J1.13 J4.P5 R6.2 TP8.TP U1.6 U2.6
SCL: J3.4 R2-PINH.1 SENSOR2.4 U2.20 U3.16 U4.7
SDA: J3.3 R1_PINH.1 SENSOR2.3 U2.19 U3.15 U4.8
SRC: C4.2 D5.2 L1.1 Q3.3
SS_SD: D8.1 J4.P2 R10.2 U2.4
TX: TP1.TP U2.25
USB_D+: D1.1 U2.14
USB_D-: D1.3 U2.13
VBAT: C2_BAT.1 MCP73831.3 Q1.3 TP3.TP U4.2 U4.3
VBUS: C1_BAT.1 C4_USB.1 C5_USB.1 CHG_LED.A D1.5 D2.2 MCP73831.4 PFMF.050.1.2 Q1.1 R1_PWRUSB.1 TP14.TP
VRTC: C8.1 C10_SUPERCAR.1 R_CAPACITOR.2 U3.14
VUSB: J2.A4 J2.A9 J2.B4 J2.B9 PFMF.050.1.1

## Tracks (layer width: path | path; a pad name or v marks a point on that pad's centre or on a via)
3V3  (via drill 0.3)
  Top 0.127: 130.86,51.9 127.36,51.9 C3.+ 127.11,52.15 123.86,52.15 123.86,53.15 IC4.5 | 130.86,51.9 132.86,51.9 132.86,49.9 C1_BAT2.1 132.86,49.65 v133.61,48.9 | 131.36,59.15 130.86,58.65 130.86,51.9 | 131.36,59.15 133.36,61.15 136.36,61.15 137.36,62.15 Q2.3 | v167.36,25.15 168.36,25.15 J3.2 | J4.P4 11.61,95.15 14.11,95.15 14.11,103.65 R10.1 14.11,103.9 13.11,103.9 C9.1 12.86,103.9 11.86,104.9 11.86,110.65 26.61,110.65 | 26.61,110.65 26.86,110.4 45.61,110.4 46.86,111.65 | 26.61,110.65 24.61,112.65 R_BOOT.2 | 46.86,111.65 47.86,112.65 48.36,112.65 R_RESET.2 | 51.36,107.15 52.11,107.15 IC1.2 52.36,107.15 52.86,107.15 54.36,108.65 59.61,108.65 63.61,112.65 R_CHANGE.2 | 46.86,111.65 51.36,107.15 | 51.36,107.15 51.36,89.15 v52.36,88.15 53.61,86.9 TP16.TP | 95.61,64.65 v91.86,64.65 90.61,64.65 89.86,63.9 89.86,63.4 U3.2 | 95.61,64.65 96.61,64.65 v96.61,63.9 96.61,63.4 R1_PINH1.2 | 95.61,64.65 91.61,68.65 D7.2 | 77.61,38.9 78.86,38.9 R_CL1.2 | 77.61,38.9 76.36,38.9 75.36,37.9 R9.1 75.11,37.9 74.61,38.4 74.11,38.4 47.86,64.65 | 77.61,38.9 85.11,46.4 90.86,46.4 90.86,49.65 R2-PINH1.2 91.11,49.9 91.36,49.9 v91.36,50.65 | U1.3 38.36,69.65 39.11,69.65 39.86,70.4 39.86,72.9 45.36,72.9 46.11,72.15 U1.8 46.11,71.9 47.11,70.9 | 42.36,60.9 42.36,61.65 R5.1 | 42.36,60.9 44.11,60.9 47.86,64.65 | 47.86,70.4 47.86,70.9 47.11,70.9 | 47.86,70.4 47.86,64.65 | 47.11,70.9 46.11,70.9 U1.7 | 35.86,42.9 28.36,42.9 R8.1 28.11,42.9 23.11,47.9 23.11,54.4 | 35.86,42.9 38.36,42.9 R6.1 | 35.86,42.9 R7.1 | 23.11,56.9 16.61,56.9 14.11,59.4 14.11,59.9 U2.2 | 23.11,56.9 24.36,56.9 R1.2 | 23.11,56.9 23.11,54.4 | 42.36,60.9 35.86,54.4 23.11,54.4
  Top 0.127: 47.86,70.4 v48.11,70.4 | v130.61,59.9 131.36,59.15
  Bottom 0.127: v167.36,25.15 133.61,25.15 v133.61,48.9 | v91.86,64.65 91.36,64.65 v91.36,50.65 | v52.36,88.15 49.61,88.15 49.61,71.9 v48.11,70.4 | v130.61,59.9 96.61,59.9 v96.61,63.9
32KHZ  (via drill 0.3)
  Top 0.127: v92.36,50.65 92.36,49.9 R2-PINH1.1 | v91.86,62.4 91.11,63.15 U3.1 | v28.36,62.9 23.11,62.9 23.11,60.15 U2.9
  Bottom 0.127: 91.86,51.15 v92.36,50.65 | v91.86,62.4 91.86,51.15 | v28.36,62.9 34.86,69.4 50.86,69.4 50.86,82.9 58.36,90.4 88.36,90.4 88.36,50.15 89.36,49.15 91.86,49.15 91.86,51.15
DN
  Top 0.127: 164.11,59.9 164.36,59.65 165.11,59.65 J2.B7 | 164.11,59.9 164.11,60.4 165.11,60.4 J2.A7 | 164.11,59.9 157.36,53.15 156.86,53.15 156.86,51.4 153.36,47.9 153.11,47.9 152.86,47.65 D1.4
DP
  Top 0.127: J2.A6 165.36,60.15 165.86,60.15 166.11,60.4 166.11,60.9 165.36,60.9 J2.B6 165.11,60.9 164.11,60.9 152.86,49.65 D1.6
EPD_3V3  (via drill 0.3)
  Top 0.127: 86.61,22.15 86.11,22.15 J1.16 | 89.11,34.9 89.11,30.4 | 89.11,30.4 89.11,27.65 EPD_C5.2 | 89.11,34.9 86.61,34.9 85.86,35.65 C7.1 | v137.61,60.15 138.36,60.15 Q2.2 | v91.86,36.15 90.61,34.9 89.11,34.9 | v86.61,22.9 86.61,22.15 | 89.11,30.4 v88.86,30.4 | 86.61,22.15 J1.15 | v81.86,64.9 71.36,75.4 58.61,75.4 47.36,86.65 TP17.TP | L1.2 88.69,39.92 v88.69,40.05
  Bottom 0.127: v137.61,60.15 128.61,51.15 93.86,51.15 93.86,38.15 v91.86,36.15 | v86.61,22.9 87.11,23.4 87.11,28.65 v88.86,30.4 86.36,32.9 86.36,40.05 | v81.86,64.9 86.36,60.4 86.36,40.05 | 86.36,40.05 v88.69,40.05
EPD_3V3_C  (via drill 0.3)
  Top 0.127: v78.36,38.4 78.86,37.9 R_CL1.1 79.11,37.9 79.86,37.9 79.86,38.9 83.86,42.9 84.61,42.9 87.36,45.65 90.61,45.65 v91.86,46.9 | v73.61,85.15 72.86,85.9 72.86,86.65 TP13.TP | v135.61,60.15 136.36,60.15 Q2.1 | v51.86,74.4 25.61,74.4 25.61,77.4 U2.18
  Bottom 0.127: v78.36,38.4 73.61,43.15 73.61,74.4 | v73.61,85.15 73.61,74.4 | v135.61,60.15 133.36,60.15 124.86,51.65 93.36,51.65 93.36,48.4 v91.86,46.9 | 73.61,74.4 v51.86,74.4
EPD_BUSY  (via drill 0.3)
  Top 0.127: v88.86,20.15 89.61,20.15 89.61,21.9 J1.9 | v20.36,76.15 20.11,76.4 16.11,76.4 15.36,77.15 U2.26 | v33.11,80.65 34.86,80.65 44.61,90.4 TP9.TP
  Bottom 0.127: v88.86,20.15 88.11,19.4 61.61,19.4 36.11,44.9 27.86,44.9 27.36,45.4 27.36,74.9 | 27.36,74.9 27.36,76.65 27.11,76.9 20.36,76.9 v20.36,76.15 | 27.36,74.9 v33.11,80.65
EPD_CS  (via drill 0.3)
  Top 0.127: J1.12 88.11,21.9 88.11,21.15 85.86,21.15 85.36,20.65 75.11,20.65 v74.11,21.65 72.86,21.65 71.86,20.65 D6.1 | v74.36,38.9 75.11,38.9 R9.2 | v28.36,62.15 25.61,62.15 25.61,60.15 U2.11 | v83.11,84.4 85.36,86.65 TP10.TP
  Bottom 0.127: v74.36,38.9 74.11,38.65 74.11,36.65 | v74.11,21.65 74.11,27.15 | 74.11,27.15 74.11,36.65 | v28.36,62.15 39.11,62.15 39.11,63.15 40.86,64.9 41.61,64.9 41.61,45.9 64.61,22.9 73.11,22.9 73.11,26.15 74.11,27.15 | v83.11,84.4 81.36,82.65 81.36,38.9 82.86,37.4 82.86,36.9 82.61,36.65 74.11,36.65
EPD_DC  (via drill 0.3)
  Top 0.127: v92.36,88.65 90.61,90.4 TP11.TP | J1.11 88.61,21.9 v88.61,21.15 v87.61,20.15 | v28.36,57.4 18.11,57.4 18.11,59.9 U2.5
  Bottom 0.127: v88.61,21.15 91.36,23.9 91.36,48.15 92.86,49.65 92.86,58.15 92.36,58.65 v92.36,88.65 | v28.36,57.4 39.11,46.65 39.11,44.15 63.11,20.15 v87.61,20.15
EPD_RST  (via drill 0.3)
  Top 0.127: v89.11,22.9 89.11,22.15 J1.10 | v80.61,86.15 80.11,86.65 79.11,86.65 TP12.TP 78.86,86.9 78.61,86.9 78.61,89.15 v76.36,91.4 | v34.11,79.65 21.86,79.65 21.86,77.65 U2.21
  Bottom 0.127: v89.11,22.9 89.36,23.15 89.36,48.65 86.86,51.15 86.86,81.4 82.11,86.15 v80.61,86.15 | v34.11,79.65 38.86,79.65 50.61,91.4 v76.36,91.4
FLASH_CS
  Top 0.127: D9.1 43.61,61.9 42.36,63.15 R5.2 42.11,63.15 37.36,63.15 | 37.36,63.15 37.36,69.65 37.86,70.15 39.11,70.15 39.11,71.15 38.36,71.9 U1.1 | 37.36,63.15 35.86,61.65 26.86,61.65 26.86,60.15 U2.12
GDR
  Top 0.127: 67.61,23.4 68.11,23.9 73.11,23.9 73.61,24.4 93.11,24.4 93.11,22.15 J1.2 | 67.61,23.4 67.11,23.4 R4.2 | 67.61,23.4 66.36,22.15 64.36,22.15 63.36,23.15 Q3.1
GND  (via drill 0.3)  (1 unrouted)
  Top 0.127: U2.29_5 18.61,67.4 18.61,68.4 U2.29_6 | v88.06,35.35 87.93,35.35 87.42,35.86 C7.2 | v88.06,34.46 88.06,34.59 86.41,34.59 86.41,34.72 86.03,35.1 85.64,35.1 85.39,35.35 85.39,35.99 85.26,36.11 81.83,36.11 81.83,35.61 81.71,35.48 80.69,35.48 80.44,35.73 80.44,36.62 75.23,36.62 64.31,25.7 64.31,24.81 64.18,24.68 63.42,24.68 63.29,24.81 63.29,26.08 63.42,26.21 64.05,26.21 64.05,26.33 74.72,37 74.72,37.13 74.47,37.38 74.47,38.15 73.83,38.15 47.8,64.18 44.24,60.62 42.46,60.62 42.46,60.5 35.99,54.02 23.41,54.02 23.41,48.05 27.35,44.12 27.48,44.12 27.48,44.5 27.73,44.75 27.99,44.75 27.99,45.13 27.86,45.26 27.86,45.64 27.48,46.02 27.48,47.54 27.35,47.54 27.35,47.67 27.48,47.8 27.48,48.18 27.35,48.18 27.35,47.8 27.48,47.67 27.61,47.8 27.61,48.05 28.11,48.05 28.24,48.18 28.24,48.94 28.11,48.94 28.11,48.69 27.99,48.69 27.73,48.94 27.61,48.94 27.35,48.69 27.35,48.56 27.48,48.56 27.86,48.94 27.99,48.94 28.11,49.07 28.37,49.07 28.62,48.81 29,48.81 29.13,48.69 29.13,48.56 29,48.56 29,48.05 28.24,48.05 D12.2 | v85.26,42.72 85.39,42.72 85.52,42.84 85.52,42.97 85.64,43.1 86.28,43.1 87.42,44.24 87.42,45 87.3,45.13 84.88,42.72 84.88,42.59 85.39,42.59 85.64,42.84 85.64,42.97 86.28,42.97 87.55,44.24 87.55,45.13 87.42,45.26 87.55,45.38 89.07,45.38 89.2,45.26 89.33,45.38 90.72,45.38 91.74,46.4 91.99,46.4 92.25,46.66 92.38,46.66 92.38,47.04 91.99,47.42 91.74,47.42 91.49,47.16 91.36,47.16 91.23,47.29 91.23,49.07 91.49,49.07 91.74,49.32 91.74,50.34 91.87,50.46 91.87,50.85 91.61,51.1 91.11,51.1 90.85,50.85 90.85,50.72 90.47,50.34 90.47,49.32 90.6,49.2 90.6,46.66 84.88,46.66 77.39,39.16 76.12,39.16 75.99,39.29 75.99,39.42 75.74,39.67 74.72,39.67 74.47,39.42 74.21,39.42 73.96,39.16 73.83,39.16 48.18,64.82 48.18,69.9 48.31,69.9 48.56,70.15 48.56,70.66 48.69,70.66 64.05,55.29 81.58,55.29 81.58,52.88 81.83,52.62 82.34,52.62 82.34,52.75 81.83,52.75 81.71,52.88 81.71,55.16 81.83,55.29 82.6,55.29 82.72,55.16 82.72,53 82.6,52.88 82.6,52.75 82.72,52.62 83.61,52.62 83.61,52.75 83.1,52.75 82.98,52.88 82.98,55.16 83.1,55.29 83.87,55.29 83.99,55.16 83.99,53 83.87,52.88 83.87,52.75 83.99,52.62 84.88,52.62 84.88,52.75 84.37,52.75 84.25,52.88 84.25,55.16 84.37,55.29 85.14,55.29 85.26,55.16 85.26,53 85.14,52.88 85.14,52.75 85.26,52.62 86.15,52.62 86.15,52.75 85.64,52.75 85.52,52.88 85.52,55.16 85.64,55.29 86.41,55.29 86.53,55.16 86.53,54.02 86.66,54.02 86.66,54.15 86.79,54.15 86.91,54.02 87.04,54.15 87.17,54.15 87.17,54.02 87.04,54.02 86.91,54.15 86.53,53.77 86.53,53.39 86.79,53.13 86.79,53 86.91,52.88 87.3,52.88 87.3,53.89 87.42,54.02 87.55,54.02 87.68,54.15 88.06,53.77 88.06,53.39 87.8,53.13 87.8,53 87.93,52.88 87.8,52.75 87.68,52.88 87.55,52.75 86.91,52.75 86.66,53 86.66,53.13 86.53,53.13 86.53,53 86.91,52.62 87.55,52.62 87.93,53 88.06,53 88.44,52.62 88.44,52.37 88.31,52.24 80.82,52.24 80.82,52.37 80.56,52.62 80.18,52.62 79.93,52.37 79.93,51.86 80.18,51.61 113.84,51.61 113.84,51.35 114.09,51.1 115.11,51.1 115.36,51.35 115.36,52.24 116.25,53.13 116.63,52.75 117.65,52.75 117.9,53 117.9,53.89 117.78,54.02 117.39,54.02 117.39,64.31 117.52,64.31 117.52,64.05 117.78,63.8 128.95,63.8 128.95,63.67 129.08,63.55 129.97,63.55 129.97,63.42 129.46,62.91 124.76,62.91 124.76,63.04 124.51,63.29 123.74,63.29 123.49,63.04 123.24,63.29 122.47,63.29 122.22,63.04 122.22,62.02 122.47,61.77 122.6,61.77 122.6,61.39 129.33,61.39 131.62,63.67 131.75,63.55 133.14,63.55 133.27,63.67 133.27,64.31 133.4,64.44 133.02,64.82 132.89,64.69 132.63,64.69 132.38,64.94 131.75,64.94 131.75,64.82 131.62,64.69 131.49,64.69 131.49,64.82 131.62,64.82 131.75,64.69 131.36,64.31 130.47,65.2 126.79,65.2 126.41,65.58 126.41,65.7 127.3,65.7 127.43,65.83 128.95,65.83 128.95,65.58 129.08,65.45 130.47,65.45 130.6,65.58 130.6,65.83 130.86,65.83 130.86,65.45 131.11,65.2 131.36,65.2 131.49,65.07 132.25,65.07 132.38,65.2 132.51,65.2 132.63,65.07 133.02,65.07 133.27,65.32 133.27,65.45 133.4,65.45 133.4,65.2 133.27,65.07 133.27,64.94 133.02,64.69 133.27,64.44 133.4,64.56 133.4,65.07 133.02,65.45 133.14,65.58 133.52,65.58 134.16,64.94 134.16,64.05 134.41,63.8 135.43,63.8 135.68,64.05 138.98,64.05 138.98,61.01 137.97,61.01 137.71,60.75 137.71,60.62 137.33,60.62 136.83,61.13 137.33,61.64 137.97,61.64 138.1,61.77 138.1,62.91 137.97,63.04 136.95,63.04 136.83,62.91 136.83,62.02 136.32,61.51 133.27,61.51 131.36,59.61 131.11,59.86 131.11,59.99 130.86,60.24 130.86,60.37 130.47,60.37 130.22,60.12 130.09,60.12 130.09,59.74 130.35,59.48 130.6,59.48 130.86,59.23 130.86,59.1 130.6,58.85 130.6,52.24 128.7,52.24 128.7,53.26 128.57,53.39 126.03,53.39 125.9,53.26 125.9,52.5 124.12,52.5 124.12,52.75 124.38,53 124.38,53.64 124.12,53.89 123.11,53.89 122.86,53.64 122.86,53 123.11,52.75 123.49,52.75 123.49,51.99 123.11,51.99 122.86,51.73 122.86,51.1 123.11,50.85 124.12,50.85 124.38,51.1 124.38,51.73 124.51,51.86 125.9,51.86 125.9,51.1 126.16,50.85 128.44,50.85 128.7,51.1 128.7,51.61 132.51,51.61 132.51,50.46 132.38,50.34 132.38,49.32 132.63,49.07 133.02,49.07 133.14,48.94 133.14,48.69 133.4,48.43 133.78,48.43 134.03,48.69 134.03,48.94 134.67,48.94 134.79,49.07 134.79,49.2 134.54,49.2 134.41,49.32 134.41,49.7 134.29,49.7 134.29,49.2 134.03,49.2 134.03,49.07 134.67,49.07 134.79,48.94 134.92,49.07 134.92,49.58 135.17,49.83 135.17,50.46 135.05,50.46 135.05,50.08 134.92,49.96 134.79,50.08 134.79,50.34 134.67,50.46 134.79,50.59 134.67,50.72 134.41,50.72 134.41,50.59 134.67,50.59 134.79,50.72 134.92,50.59 134.92,50.08 135.05,49.96 135.05,49.83 134.54,49.83 134.29,50.08 134.16,49.96 133.78,49.96 133.78,50.34 133.9,50.46 134.16,50.46 134.16,50.59 134.03,50.72 133.78,50.72 133.78,50.59 134.03,50.59 134.16,50.72 134.29,50.72 134.29,50.21 134.41,50.08 134.16,49.83 133.78,49.83 133.78,49.32 133.65,49.32 133.65,50.34 133.4,50.59 133.14,50.59 133.14,52.12 133.02,52.24 131.24,52.24 131.24,58.59 133.52,60.88 135.81,60.88 135.81,60.62 135.43,60.62 135.17,60.37 135.17,59.86 135.43,59.61 137.08,59.61 137.21,59.74 137.33,59.74 137.46,59.61 138.98,59.61 138.98,54.78 139.11,54.78 147.11,46.78 147.11,46.66 147.24,46.53 148.26,46.53 148.26,44.88 149.27,44.88 149.4,44.75 149.53,44.75 149.53,44.12 149.27,44.12 149.14,44.24 148.89,43.99 148.76,44.12 148.26,44.12 148.26,44.62 148.13,44.62 148,44.5 148,43.61 148.13,43.61 148.13,44.5 148,44.62 148.13,44.75 149.27,44.75 149.4,44.88 149.53,44.88 149.65,44.75 149.65,43.86 149.78,43.73 149.53,43.48 148.38,43.48 148.13,43.23 148.13,42.46 148.38,42.21 149.4,42.21 149.65,42.46 149.65,42.59 151.05,42.59 151.05,39.16 150.29,39.16 150.16,39.03 150.16,35.23 150.29,35.1 152.07,35.1 152.19,35.23 152.19,39.03 152.07,39.16 151.68,39.16 151.68,42.59 151.94,42.59 151.94,42.46 152.19,42.21 153.21,42.21 153.46,42.46 153.46,43.23 153.34,43.35 153.59,43.61 153.59,44.5 153.46,44.62 153.34,44.62 153.34,44.12 153.08,44.12 152.95,44.24 152.7,43.99 152.57,44.12 152.07,44.12 152.07,44.75 151.94,44.75 151.94,43.48 153.34,43.48 153.46,43.61 153.46,44.5 153.59,44.62 153.46,44.75 152.19,44.75 151.94,45 151.94,47.04 153.34,47.04 153.59,47.29 153.59,47.67 156.76,50.85 156.89,50.72 156.89,49.83 157.15,49.58 158.42,49.58 158.42,49.7 157.4,49.7 157.27,49.83 157.15,49.83 157.15,50.46 157.4,50.46 157.53,50.34 157.78,50.59 157.91,50.46 158.42,50.46 158.42,49.96 158.54,49.96 158.67,50.08 158.67,50.97 158.54,50.97 158.54,50.08 158.67,49.96 158.54,49.83 157.4,49.83 157.27,49.7 157.15,49.7 157.02,49.83 157.02,50.72 156.89,50.85 156.89,50.97 157.02,51.1 158.29,51.1 158.54,51.35 158.54,52.12 158.29,52.37 158.16,52.37 158.16,52.88 158.8,52.88 163.24,57.32 164,56.56 164.26,56.56 164.26,57.58 164.38,57.58 164.38,55.16 165.4,55.16 165.78,54.78 165.78,53.89 165.91,53.77 165.78,53.64 165.65,53.64 165.65,54.78 165.91,55.04 165.91,55.16 167.05,55.16 167.05,56.43 166.8,56.43 166.54,56.69 166.42,56.56 166.16,56.56 166.04,56.43 165.91,56.43 165.78,56.56 165.78,56.69 166.42,56.69 166.8,57.07 166.92,57.07 166.92,57.58 166.42,58.09 166.29,58.09 166.29,58.21 166.67,58.21 166.8,58.34 166.8,58.59 166.92,58.72 166.92,62.53 166.8,62.66 166.8,62.78 166.92,62.91 166.92,63.42 166.67,63.67 166.67,63.8 166.54,63.93 166.42,63.93 166.16,64.18 166.04,64.05 165.91,64.05 165.91,63.93 166.16,63.93 166.16,64.05 166.04,64.18 165.91,64.18 165.78,64.05 165.78,63.93 165.91,63.8 166.54,63.8 166.67,63.93 166.92,63.93 167.05,64.05 167.05,65.07 167.18,65.2 167.18,66.72 166.92,66.98 166.8,66.98 166.67,66.85 166.04,66.85 165.91,66.98 165.53,66.98 165.4,66.85 164.51,66.85 164.38,66.72 164.38,65.7 164.26,65.58 164.26,62.91 164.38,62.91 164.38,65.2 165.4,65.2 165.53,65.32 165.4,65.45 164.38,65.45 164.38,65.32 165.4,65.32 165.78,65.7 165.78,66.85 165.65,66.85 165.65,65.7 165.91,65.45 165.91,65.32 167.05,65.32 167.05,66.47 166.92,66.59 166.92,66.85 167.05,66.98 169.34,66.98 169.34,66.85 168.45,66.85 168.32,66.72 168.32,65.7 168.19,65.58 168.19,65.32 168.32,65.2 168.32,64.05 168.45,63.93 169.34,63.93 169.46,63.8 169.72,63.8 169.85,63.93 170.86,63.93 170.99,64.05 170.99,65.07 171.12,65.2 171.12,65.58 170.99,65.7 170.99,66.72 170.86,66.85 169.85,66.85 169.85,65.45 169.97,65.32 170.99,65.32 170.99,65.45 169.97,65.45 169.59,65.07 169.59,63.93 169.72,63.93 169.72,65.07 169.34,65.45 168.32,65.45 168.32,65.32 169.34,65.32 169.59,65.58 169.59,66.85 169.72,66.85 169.72,65.45 J2.MP2
  Top 0.127: v85.9,40.81 85.9,41.07 86.03,41.07 86.15,41.19 86.15,42.34 86.53,42.34 88.31,44.12 89.07,44.12 89.2,44.24 89.2,44.62 98.47,44.62 98.6,44.5 98.6,43.99 96.82,43.99 96.69,44.12 95.3,44.12 95.17,43.99 95.17,42.84 92.63,40.3 91.87,40.3 91.74,40.18 91.74,39.16 91.87,39.03 93.26,39.03 93.39,39.16 93.39,40.3 95.93,42.84 96.69,42.84 96.82,42.97 96.82,43.35 98.47,43.35 98.6,43.23 98.6,42.46 98.85,42.21 99.87,42.21 100.12,42.46 100.12,43.23 99.87,43.48 100.12,43.73 100.12,44.5 99.87,44.75 99.61,44.75 99.61,45.13 99.49,45.26 90.98,45.26 90.98,45.51 91.74,46.27 92.12,46.27 92.25,46.4 92.25,46.53 92.38,46.53 92.5,46.66 92.5,49.07 92.76,49.07 93.01,49.32 93.01,50.34 92.88,50.46 92.88,50.85 92.63,51.1 92.12,51.1 91.99,50.97 91.87,51.1 91.99,51.23 93.64,51.23 104.95,39.92 102.03,37 89.71,37 89.71,42.46 89.58,42.59 87.3,42.59 87.17,42.46 87.17,41.19 87.42,40.94 87.55,40.94 88.06,40.43 88.06,40.18 88.18,40.05 88.18,39.29 88.06,39.16 88.06,38.91 87.42,38.27 87.3,38.27 87.17,38.15 87.17,37 86.15,37 86.15,38.15 85.9,38.4 85.77,38.4 85.26,38.91 85.26,39.16 85.14,39.29 85.14,40.05 85.26,40.18 85.26,40.43 85.64,40.81 85.77,40.81 85.9,40.69 87.04,41.83 87.04,42.46 87.3,42.72 91.49,42.72 91.74,42.97 91.61,43.1 91.61,44.12 91.74,44.24 92.63,44.24 92.63,43.99 92.5,43.86 92.5,43.61 92.38,43.48 91.74,43.48 91.74,43.1 91.61,42.97 91.87,42.72 92.63,42.72 92.63,42.97 92.5,43.1 92.5,43.35 92.63,43.35 92.76,43.48 93.52,43.48 93.52,43.61 93.39,43.73 93.39,44.12 93.26,44.24 92.88,44.24 92.76,44.12 92.76,43.99 92.63,43.86 92.63,43.61 92.76,43.61 92.76,43.73 93.01,43.99 93.14,43.99 93.26,43.86 93.26,43.73 93.39,43.61 93.52,43.73 93.52,43.86 93.64,43.86 93.64,43.48 93.39,43.23 93.39,42.84 93.26,42.72 92.88,42.72 92.76,42.84 92.76,42.97 92.63,43.1 92.63,43.23 93.26,43.23 93.39,43.35 93.52,43.23 93.52,43.1 94.41,42.21 92.63,40.43 91.87,40.43 91.61,40.18 91.61,39.16 91.87,38.91 93.26,38.91 93.52,39.16 93.52,40.3 95.93,42.72 96.06,42.59 96.06,40.3 95.3,40.3 95.17,40.18 95.17,39.16 95.42,38.91 95.42,38.65 95.68,38.4 96.06,38.4 96.31,38.65 96.31,39.03 96.69,39.03 96.82,39.16 96.82,40.18 96.69,40.3 96.19,40.3 96.19,40.43 96.69,40.43 97.2,39.92 97.2,39.54 98.85,37.89 102.79,37.89 104.95,40.05 105.08,40.05 116.38,51.35 116.38,51.73 116.63,51.99 117.65,51.99 117.78,51.86 117.9,51.86 119.55,53.51 120.06,53.51 120.06,53.64 120.31,53.89 121.33,53.89 121.58,53.64 121.58,51.86 121.46,51.86 121.33,51.99 121.46,52.12 121.46,52.37 120.95,52.37 120.82,52.5 120.7,52.5 120.57,52.37 119.93,52.37 119.93,52.5 120.19,52.75 120.19,52.88 120.06,52.88 119.93,52.75 119.81,52.88 118.03,51.1 117.9,51.1 117.9,50.85 117.78,50.72 117.39,50.72 117.39,50.59 118.41,49.58 120.06,51.23 120.06,52.24 v119.93,52.24
  Top 0.127: v121.71,52.24 121.71,52.75 121.84,52.75 121.84,52.24 121.71,52.12 121.71,51.86 121.58,51.73 121.58,51.1 121.33,50.85 120.44,50.85 118.79,49.2 119.93,48.05 120.7,48.05 120.95,47.8 120.95,46.66 121.2,46.4 121.33,46.53 122.22,46.53 122.35,46.66 122.35,46.78 122.22,46.91 122.22,48.05 122.09,48.18 121.97,48.05 121.08,48.05 121.08,48.18 121.97,48.18 122.09,48.05 122.09,47.92 121.58,47.92 121.58,47.42 121.46,47.29 121.71,47.04 121.58,46.91 121.58,46.66 122.22,46.66 122.22,46.78 122.35,46.91 122.35,47.92 122.47,47.92 122.47,46.66 122.22,46.4 121.33,46.4 121.08,46.66 120.95,46.53 120.82,46.66 120.7,46.53 119.93,46.53 119.68,46.78 119.68,47.42 117.01,50.08 116,50.08 102.28,36.37 92.38,36.37 92.38,35.99 92.12,35.73 91.87,35.73 90.72,34.59 89.45,34.59 89.45,28.24 89.71,28.24 89.83,28.11 89.96,28.24 90.47,28.24 90.98,28.75 94.53,28.75 94.66,28.62 94.66,21.76 93.26,20.37 91.36,20.37 91.23,20.49 91.23,21.38 89.96,21.38 89.96,21.25 90.47,21.25 90.47,21.13 89.96,21.13 89.96,19.98 89.83,19.86 89.2,19.86 89.07,19.73 88.56,19.73 88.44,19.86 88.44,20.37 88.31,20.37 88.06,20.11 88.06,19.86 87.93,19.73 87.3,19.73 87.17,19.86 87.17,20.37 87.42,20.62 87.68,20.62 87.8,20.75 87.8,20.87 86.03,20.87 85.52,20.37 81.83,20.37 81.58,20.11 81.45,20.11 81.2,20.37 80.82,20.37 80.56,20.11 80.56,19.98 80.69,19.98 80.94,20.24 81.2,20.24 81.33,20.37 81.58,20.37 81.58,20.24 81.71,20.11 81.71,18.97 81.58,18.84 80.69,18.84 80.56,18.97 80.56,19.1 80.69,19.22 80.69,19.73 80.56,19.73 80.56,19.22 80.82,18.97 81.2,18.97 81.2,19.35 81.45,19.6 81.58,19.6 81.58,19.48 81.45,19.48 81.2,19.73 81.07,19.73 80.94,19.6 80.94,19.48 81.07,19.35 81.07,19.1 80.82,19.1 80.56,18.84 80.44,18.97 80.44,19.73 80.56,19.86 80.69,19.86 80.94,20.11 80.69,20.37 74.98,20.37 74.21,21.13 74.09,21.13 74.09,21 74.34,20.75 74.34,20.49 74.21,20.49 74.09,20.62 73.58,20.62 73.45,20.49 73.45,19.73 73.33,19.73 73.33,19.98 73.2,19.98 72.94,19.73 72.82,19.73 72.56,19.98 72.69,20.11 72.82,20.11 72.82,19.86 72.94,19.86 73.07,19.73 73.2,19.73 73.33,19.6 73.58,19.6 73.83,19.86 74.21,19.86 74.34,19.98 74.34,20.11 74.21,20.11 74.21,20.24 74.09,20.37 74.09,20.49 74.21,20.62 74.21,20.75 74.09,20.87 74.21,21 74.47,20.75 74.47,20.49 74.34,20.37 74.34,20.24 74.47,20.11 74.47,19.98 74.21,19.73 73.83,19.73 73.33,19.22 72.94,19.22 72.31,19.86 71.42,19.86 71.17,20.11 71.17,21.13 71.42,21.38 72.18,21.38 72.82,22.02 72.69,22.14 72.69,22.65 72.94,22.91 73.33,22.91 73.45,22.78 74.47,22.78 74.59,22.65 74.85,22.65 74.85,22.52 75.1,22.27 75.1,21.89 74.98,21.89 74.72,21.64 74.72,21.51 75.23,21 82.09,21 82.09,21.38 81.96,21.38 81.71,21.64 81.45,21.64 81.07,22.02 81.07,22.27 81.45,22.65 81.83,22.65 81.96,22.78 82.34,22.78 82.34,23.03 73.45,23.03 73.45,22.91 v74.59,22.91